# EAGLE board drive (EAGLE 5.09)

Size 75 x 35 mm. Coordinates in mm from the lower left corner, seen from the top.
Outline: 0,10 arc-90 25,35 50,35 arc-90 75,10 45.5,10 45.5,0 40.5,0 40.5,10 34.5,10 34.5,0 29.5,0 29.5,10 0,10
Outline: circle at 40,13 radius 1.5
Outline: circle at 35,13 radius 1.5
Copper layers (1*16): Top 0.035mm / dielectric 1.5mm / Bottom 0.035mm
Design rules "default": minimum track width 10mil, minimum drill 0.6mm, track to track 8mil, track to pad 8mil, pad to pad 8mil, via to via 8mil, smd to smd 8mil, copper to edge 40mil, drill to drill 8mil, minimum pad ring 10mil, minimum via ring 8mil, stop-mask expansion 4mil, vias tented up to drill 0mil, thermal gap 10mil
Holes 3 mm at 35,13 40,13 37.5,31.5

## Footprints (pad centres in the part's own frame; a part is rotated, then mirrored left to right if it is on the bottom)
53047-06 = drill 0.5 pad 0.698 long: 1 3.125,0.45; 2 1.875,0.45; 3 0.625,0.45; 4 -0.625,0.45; 5 -1.875,0.45; 6 -3.125,0.45

## Placement (x,y rotation side)
M1  FAULHABER-1524INLINE  [53047-06]  44.45,22.86 0 top
M2  FAULHABER-1524INLINE  [53047-06]  44.45,17.78 0 top

## Library data of the parts
M1 M2 = FaulhaberMotors

## Nets
+5V: M1.4 M2.4
GND: M1.3 M2.3

## Tracks (layer width: path | path; a pad name or v marks a point on that pad's centre or on a via)
+5V  (1 unrouted)
GND  (1 unrouted)